# Altium PCB modulo_micro_starter_pcb.PcbDoc
Units mm, origin at the board's own origin, x right, y up, seen from the top; angles counter-clockwise.
Board outline 14.99 x 15.62 mm, 2 copper layers (Top Layer, Bottom Layer); 14 components, 11 nets, 41 pads, 9 vias.
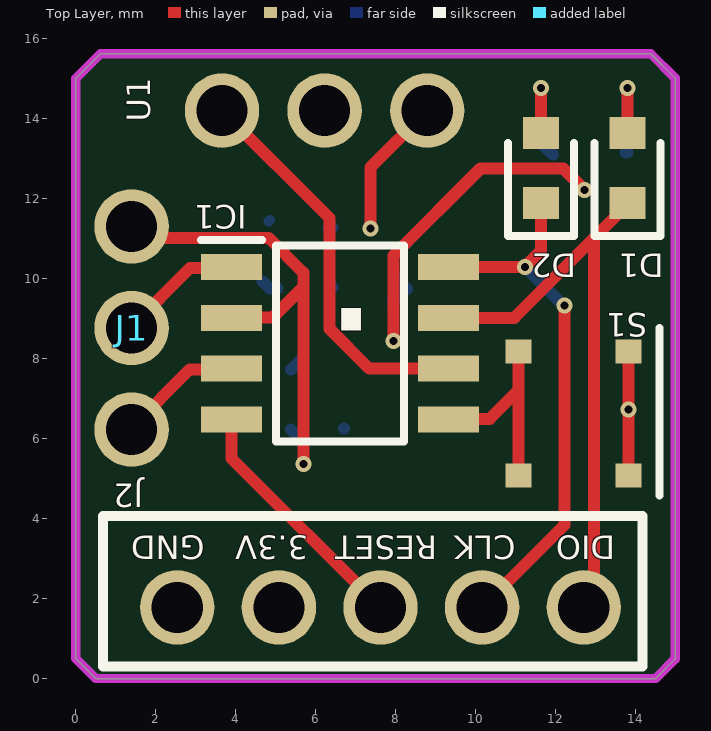
[diagram p0: Top Layer view]
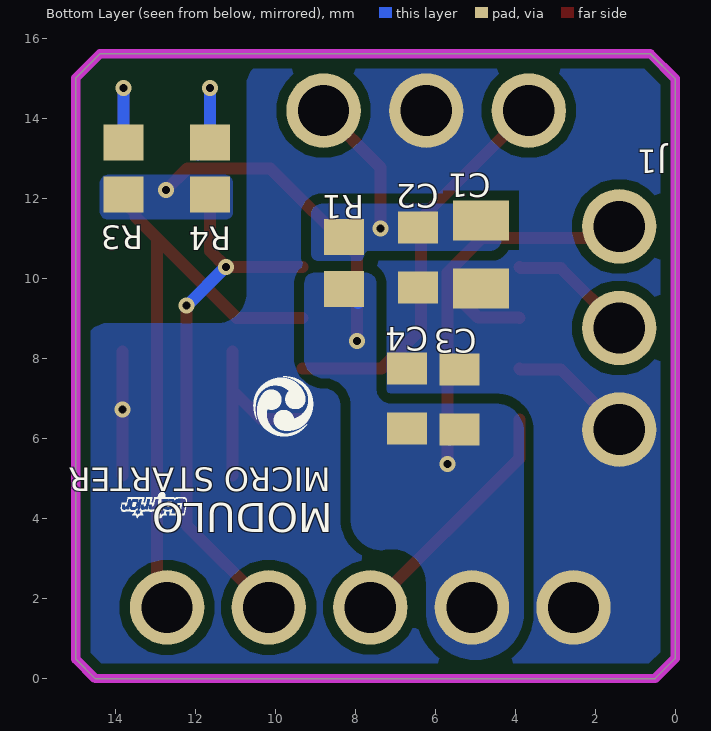
[diagram p1: Bottom Layer view, seen from below]

## Layer stack, top to bottom
Top Solder: solder mask 0.0102, Solder Resist, Dk 3.5
Top Layer: signal copper 0.0356
Dielectric 1: dielectric 0.32, FR-4, Dk 4.8
Bottom Layer: signal copper 0.0356
Bottom Solder: solder mask 0.0102, Solder Resist, Dk 3.5

## Board outline
0,15 0,0.5 0.5,0 14.5,0 14.986,0.486 14.986,15.014 14.379,15.621 0.621,15.621

## Design rules (kind name [scope] priority, off if disabled: settings)
Clearance [All] p1: gap=0.254 ignorepadtopadclearanceinfootprint=FALSE except(0: Arc-Hole Track-Hole SMDPad-Hole THPad-Hole Via-Hole Fill-Hole Poly-Hole Region-Hole Text-Hole)
PlaneConnect [All] p1: planeconnectstyle=Direct reliefexpansion=0.508 reliefentries=4 reliefconductorwidth=0.254 reliefairgap=0.254
PolygonConnect [All] p1: connectstyle=Direct reliefconductorwidth=0.254 reliefentries=4 polygonreliefangle="90 Angle" airgapwidth=0.254
RoutingVias [All] p1: holewidth=0.711 width=1.27 viastyle="Through Hole" minholewidth=0.711 minwidth=1.27 maxholewidth=0.711 maxwidth=1.27
SolderMaskExpansion [All] p1: expansion=0.102 istentingtop=FALSE
Width [All] p1: maxlimit=0.3 minlimit=0.254 preferedwidth=0.3 minimp=50.000000 maximp=50.000000 favimp=50.000000
29 further rules are at their usual default settings.

## Components (designator, comment, footprint, x,y, rotation, side; value= is the part's Value field where it differs from the comment)
C1 "100 uF" C0805 14.65,28.74 r90 bottom
C2 "0.1 uF" C0603 -66.962,197.74 r90 bottom
C3 "0.1 uF" C0603 78.773,-180.239 r270 bottom
C4 "4.7uF" C0603 80.094,-180.214 r270 bottom
D1 "Green" LED_0603 13.792,12.637 r90 top
D2 "Green" LED_0603 11.633,12.637 r90 top
IC1 "STM32G030J6M6" SO8N 6.604,8.382 r0 top
J1 "Male Header 3" "MALE HEADER 3" 1.397,11.303 r270 top
J2 "STM Bootloader" "STM BOOTLOADER" 12.7,1.778 r180 top
R1 "100 R" RESISTOR_0603 8.28,10.389 r270 bottom
R3 "100 R" RESISTOR_0603 13.792,12.751 r90 bottom
R4 "100 R" RESISTOR_0603 11.633,12.751 r90 bottom
S1 "PTS540JK035SMTRLFS" PUSH_BUTTON 11.068,8.18 r270 top
U1 "VS1838B" "FEMALE HEADER 3" 8.788,14.199 r180 top

## Footprints (in the part's own frame and the unit in brackets; to place one, negate y for a bottom-side part, rotate by r counter-clockwise, add the part's x,y. Pads: shape width x height; smd on the part's side, far side on the other; paste and mask are expansions set on the pad)
C0603 [mm]
  rect 0.8x1 smd: 1(-187.961,73.388) 2(-186.461,73.388)
  body extent -188.06,72.92 -186.36,73.82, height 0.8
C0805 [mm]
  rect 1x1.4 smd: 1(-18.985,-9.799) 2(-17.285,-9.799)
  body extent -19.21,-10.47 -17.06,-9.12, height 0.9
"FEMALE HEADER 3" [mm]
  round 1.86 hole 1.28: PIN1(0,0) PIN2(2.565,0) PIN3(5.13,0)
  body extent -1.52,-1.27 6.6,1.27, height 8.5
LED_0603 [mm]
  rect 0.8x0.9 smd: A(1.003,0) C(-0.75,0)
  silkscreen extent -1.58,-0.82 0.75,0.82, body extent -0.67,-0.4 0.93,0.4, height 0.7
"MALE HEADER 3" [mm]
  round 1.86 hole 1.28: PIN1(0,0) PIN2(2.54,0) PIN3(5.08,0)
  body extent -1.27,-1.27 6.35,1.27, height 3.5
PUSH_BUTTON [mm]
  rect 0.6x0.65 smd: 1(0,2.75) 1(3.1,2.75) 2(0,0) 2(3.1,0)
  silkscreen extent -0.58,3.53 3.61,3.53, body extent -0.29,-0.45 3.41,3.25, height 0.3
RESISTOR_0603 [mm]
  rect 0.9x1 smd: 1(-0.65,0) 2(0.65,0)
  body extent -0.8,-0.4 0.8,0.4, height 0.55
SO8N [mm]
  rect 1.525x0.65 smd: 1(-2.712,1.905) 2(-2.712,0.635) 3(-2.712,-0.635) 4(-2.712,-1.905) 5(2.712,-1.905) 6(2.712,-0.635) 7(2.712,0.635) 8(2.712,1.905)
  silkscreen extent -3.47,-2.45 1.6,2.58, body extent -3,-2.45 3,2.45, height 1.75
"STM BOOTLOADER" [mm]
  round 1.86 hole 1.28: CLK(2.54,0) DIO(0,0) GND(10.16,0) RESET(5.08,0) VCC(7.62,0)
  silkscreen extent -1.47,-2.29 12.01,1.47, body extent -1.32,-1.19 11.88,1.35, height 8.5

## Part data
C1: library part JMK212BBJ107MG-TE, "CAP CER 100UF 6.3V X5R 0805", Manufacturer="TAIYO YUDEN", Operating Temperature="-55 C ~ 85 C", Package / Case="0805 (2012 Metric)", Part Number=JMK212BBJ107MGTE, Supplier Part Number 1=963-JMK212BBJ107MGTE, Tolerance=20%, Voltage - Rated=6.3V, Category="Ceramic Capacitor", ComponentLink1Description=Datasheet, ComponentLink1URL=https://ds.yuden.co.jp/TYCOMPAS/ut/detail?pn=JMK212BBJ107MG-TE&u=M, ComponentLink2Description="Mouser Link", ComponentLink2URL=https://br.mouser.com/ProductDetail/Taiyo-Yuden/JMK212BBJ107MG-TE?qs=%2Fha2pyFadujnrq1V71i9DT3lBuRfsdZxICgBGkmgMyDSXYhp4%252BfygEm2aQR9aTWJ, Dieletric=X5R, ESR=-, Library Control - Checked Footprint=Yes, Library Control - Checked Schematic=Yes, Library Control - Last Update="28/06/2021 00:45", Library Control - Person that Checked Footprint=Nikaum, Library Control - Person that Checked Schematic=Nikaum, Library Control - Person that did the Last Update Footprint=Nikaum, Library Control - Person that did the Last Update Schematic=Nikaum, Library Ref=Capacitor, Price="1= 1,81, 10= 1,32, 100= 1,05 (USD)", Size / Dimension="2,00 L x 1,25 W x 1,45 H", Supplier 1=MOUSER
C2 C3: library part GRM188R71E104KA01D, "CAP CER 0.1uF 25V X7R 0603", Manufacturer="Murata Electronics", Operating Temperature="-55 C ~ 125 C", Package / Case="0603 (1608 Metric)", Supplier Part Number 1=81-GRM39X104K25, Tolerance=10%, Voltage - Rated="25 VDC", Category="Ceramic Capacitors", ComponentLink1Description=Datasheet, ComponentLink1URL=https://br.mouser.com/datasheet/2/281/murata_03052018_GRM_Series_1-1310166.pdf, ComponentLink2Description="Mouser Link", ComponentLink2URL=https://br.mouser.com/ProductDetail/Murata-Electronics/GRM188R71E104KA01D?qs=%2Fha2pyFaduiZGTXBCPzk%2FmTbMtAE8bS6%252BO3gVgb8hKBi1xePxGtiOg%3D%3D, Dieletric=X7R, ESR="100 mΩ", Library Control - Checked Footprint=Yes, Library Control - Checked Schematic=Yes, Library Control - Last Update="28/06/2021 00:22", Library Control - Person that Checked Footprint=Nikaum, Library Control - Person that Checked Schematic=Nikaum, Library Control - Person that did the Last Update Footprint=Raquel, Library Control - Person that did the Last Update Schematic=Nikaum, Library Ref=Capacitor, Part Number=GRM188R71E104KA01D, Price=-, Size / Dimension="1,60 L x 0,80 W x 0,80 H", Supplier 1=Mouser
C4: library part CC0603KRX5R8BB475, "CAP CER 4.7uF 25V X5R 0603", Manufacturer=Yageo, Operating Temperature="-55 C ~ 125 C", Package / Case="0603 (1608 Metric)", Supplier Part Number 1=603-CC0603KRX58BB475, Tolerance=10%, Voltage - Rated=25V, Category="Ceramic Capacitor", ComponentLink1Description=Datasheet, ComponentLink1URL=https://br.mouser.com/datasheet/2/447/yago_s_a0011397150_1-2286655.pdf, ComponentLink2Description="Mouser Link", ComponentLink2URL=https://br.mouser.com/ProductDetail/Yageo/CC0603KRX5R8BB475?qs=%2Fha2pyFaduh%2F7Q8z%252B7Ot0eflSx5gYDgPHryPFxzpgCUeMwc25ZtPlNgXae48%252BTjy, Dieletric=X5R, ESR=0.05, Library Control - Checked Footprint=Yes, Library Control - Checked Schematic=Yes, Library Control - Last Update="27/06/2021 23:47", Library Control - Person that Checked Footprint=Nikaum, Library Control - Person that Checked Schematic=Nikaum, Library Control - Person that did the Last Update Footprint=Nikaum, Library Control - Person that did the Last Update Schematic=Nikaum, Library Ref=Capacitor, Part Number=CC0603KRX5R8BB475, Price="1=0.25, 10=0.164, 100=0,093 (USD)", Size / Dimension="1,60 L x 0,80 W x 0,87 H", Supplier 1=Mouser
D1 D2: library part 150060VS75000, "LED 0.072W GREEN 40MCD 0603", Current - Forward (If)="20 mA", Manufacturer="Wurth Elektronik", Max Current Rating=100mA, Max Power Dissipation=72mW, Operating Temperature="-40~85 °C", Package / Case=0603, Reverse Voltage=5V, Supplier Part Number 1=710-150060VS75000, Voltage - Forward (Vf)="2 V", Category="Standard LEDs - SMD", Color=Green, ComponentLink1Description="Mouser Link", ComponentLink1URL=https://br.mouser.com/ProductDetail/Wurth-Elektronik/150060VS75000?qs=%2Fha2pyFaduhuT%2FKGSijZP0vTyJZ9U993KfsBQSxqATYhY9jnc2c09tXoMoJ3wn4L, ComponentLink2Description="Datasheet Link", ComponentLink2URL=https://br.mouser.com/datasheet/2/445/150060VS75000-1714627.pdf, Library Control - Checked Footprint=25/07/2021, Library Control - Checked Schematic=25/07/2021, Library Control - Last Project that Used=Diodo/Led, Library Control - Last Update=06/08/2021, Library Control - Person that Checked Footprint=Nícolas, Library Control - Person that Checked Schematic=Nícolas, Library Control - Person that did the Last Update Footprint=Marcos, Library Control - Person that did the Last Update Schematic=Marcos, Library Ref=LED, Luminous Intensity="40 mcd", Manufacturer Part Number=150060VS75000, Price="1 = 0.15, 50 = 0.138, 100 = 0.118 (USD)", Supplier 1=Mouser, Viewing Angle=140°, Wavelength=570nm
IC1: "IC MCU 32-BIT 8kB FLASH ARM Cortex M0+ 64MHZ  SO8N", Manufacturer=STM, Operating Temperature="-40°C to 85°C", Package/Case=SO8N, Supplier Part Number 1=511-STM32G030J6M6, Voltage - Supply (Vcc/Vdd)="2 V to 3.6 V", Category="ARM Microcontrollers - MCU", ComponentLink1Description="Mouser Link", ComponentLink1URL=https://www.mouser.com/ProductDetail/STMicroelectronics/STM32G030J6M6?qs=uwxL4vQweFMe%2Fiu4dY6izA%3D%3D, ComponentLink2Description="Datasheet Link", ComponentLink2URL=https://www.mouser.com/datasheet/2/389/dm00613878-1799578.pdf, Connectivity=-, Core Processor="ARM Cortex M0+", Library Control - Person that did the Last Update Footprint=Marcos, Library Control - Person that did the Last Update Schematic=Marcos, Library Ref=Microcrontrollers, Number of ADC Channels=4, Number of Ethernet Channels=-, Number of I2C Channels=1, Number of I/Os=5, Number of SPI Channels=3, Number of Timers/Counters=2, Number of UART/USART Channels=1, Oscillator Type=Internal, Part Number=STM32G030J6M6, Peripherals="ADC, Timer, DMA", Price="1 = 1,46, 10 = 1,31,  100 = 1,02, 1000 = 0,665 (USD)", Program Memory Size=64kB, Program Memory Type=Flash, RAM Size="8k B", Series=STM32G0, Speed=64MHz, Supplier 1=Mouser
J2: library part "Barramento de Gravação STM", "BARRAMENTO DE GRAVAÇÃO", Library Ref=Header, Number of Contacts=5
R1 R3 R4: library part RC0603FR-10100RL, "RES SMD 100 OHM 1% 1/10W 0603", Manufacturer=Yageo, Operating Temperature="- 55 C~155 C", Package / Case="0603 (1608 metric)", Power Rating="100mW (1/10W)", Resistor Type=Fixo, Supplier Part Number 1=603-RC0603FR-10100RL, Temperature Coefficient="100 PPM / C", Tolerance="1 %", Voltage Rating="75 V", Category="Thick Film Resistors - SMD", ComponentLink1Description="Mouser Link", ComponentLink1URL=https://br.mouser.com/ProductDetail/Yageo/RC0603FR-10100RL/?qs=EiqXWrxQq62RG9T9SdQg0g==, ComponentLink2Description="Datasheet Link", ComponentLink2URL=https://br.mouser.com/datasheet/2/447/Yageo_03_18_2021_PYu_RC_Group_51_RoHS_L_11-2199992.pdf, Library Control - Checked Footprint=Yes, Library Control - Checked Schematic=Yes, Library Control - Last Update="27/06/2021 21:11", Library Control - Person that Checked Footprint=Nikaum, Library Control - Person that Checked Schematic=Nikaum, Library Control - Person that did the Last Update Footprint=Nicolas, Library Control - Person that did the Last Update Schematic=Nikaum, Library Ref=Resistor, Part Number=RC0603FR-10100RL, Price="1 = 0,10, 10 = 0,018, 100 = 0,006 (USD)", Size / Dimension="1,60 L x 0,80 W x 0,45 H", Supplier 1=Mouser
S1: library part "Push Button", "TACTILE SWITCH SPST 0.05A 12VDC SMD", Current Rating=50mA, Manufacturer="C&K Switches", Operating Force=230gf, Supplier Part Number 1=611-PTS540JK035SMTRL, Voltage Rating (DC)=12V, Bounce time (MAX)=10ms, Category="Tactile Switches", ComponentLink1Description=Datasheet, ComponentLink1URL=https://www.mouser.com/datasheet/2/60/pts540-1841856.pdf, ComponentLink2Description="Mouser Link", ComponentLink2URL=https://www.mouser.com/ProductDetail/CK/PTS540JK035SMTRLFS?qs=nsc5Ve2%252BdoHscnqTjIh87g%3D%3D, Library Control - Checked Footprint=Yes, Library Control - Checked Schematic=Yes, Library Control - Person that Checked Footprint=Nícolas, Library Control - Person that Checked Schematic=Nícolas, Library Control - Person that did the Last Update Schematic=Nícolas, Library Ref=Diversos, Orientation=Straight, Part Number=PTS540JK035SMTRLFS, Pricing 1="1=0,18, 10=0,174, 100=0,15, 500=0,122, 1000=0,103 (USD)", Supplier 1=Mouser, Switch Function=Off-On, Throw Configuration=SPST
U1: "INFRARED RECEIVER MODULE", Manufacturer=-, Operating Supply Current="0.4 mA", Operating Temperature (Min - Máx)="-20~80 °C", Supply Voltage (Min - Máx)="(2.7 - 5.5)V", ComponentLink1Description=Datasheet, ComponentLink1URL=https://datasheetspdf.com/pdf-file/700398/ETC/VS1838B/1, ComponentLink2Description="Mouser Link", ComponentLink2URL=-, Library Control - Last Update=06/08/2021, Library Control - Person that did the Last Update in Footprint=Marcos, Library Control - Person that did the Last Update in Schematic=Marcos, Library Ref=Diversos, Output Type=Digital, Package / Case=-, Part Number=VS1838B, Price=-, Sensitivity="+/- 45°", Sensor Type=Infrared, Supplier 1=-
J1: Library Control - Person that did the Last Update Schematic=Guilherme, Library Control - Persont that did the Last Update Footprint=Guilherme, Library Ref=Header, Number of Contacts=3, System=Connector

## Via types
v1: diameter 0.4, hole 0.2, Top Layer to Bottom Layer, tented both sides, 9 vias

## Nets (pads, with @x,y where several pads share a name; then routed paths per layer and width w, separated by ;. In a path a pad name is that pad's centre, name@x,y a point inside that pad or via, vN(x,y) a via of type N, cw(c..) or ccw(c..) an arc to the next point about the centre after c; other vN are vias at no path point)
"BLUE LED": D2.C IC1.8 J2.CLK | length 13.5
  Top Layer w0.3: IC1.8 v1(11.227,10.287) 11.633,10.693 D2.C ; J2.CLK 12.217,3.835 v1(12.217,9.322)
  Bottom Layer w0.3: v1(11.227,10.287) 11.239,10.287 12.205,9.322 v1(12.217,9.322)
BUTTON: IC1.5 S1.2 | length 5.2
  Top Layer w0.3: IC1.5 9.331,6.492 10.353,6.492 11.068,7.207 ; S1.2@11.068,5.079 11.068,7.207 ; S1.2@11.068,8.179 11.068,7.207
IR: IC1.6 U1.PIN3 | length 10
  Top Layer w0.3: U1.PIN3 6.348,11.508 6.348,8.739 7.341,7.747 IC1.6
NetC1_2: C1.2 C2.2 R1.1 U1.PIN1 | length 3.7
  Top Layer w0.3: v1(7.366,11.252) 7.366,12.777 U1.PIN1
  Bottom Layer w0.254: C1.2@4.827,11.431 C1.2
  Bottom Layer w0.3: C2.2@6.326,11.279 C2.2
NetD1_A: D1.A R3.2 | length 2.5
  Top Layer w0.3: D1.A v1(13.792,14.757)
  Bottom Layer w0.3: R3.2@13.742,13.147 R3.2@13.792,13.147 ; R3.2 v1(13.792,14.757)
NetD2_A: D2.A R4.2 | length 2.9
  Top Layer w0.3: D2.A v1(11.633,14.757)
  Bottom Layer w0.3: v1(11.633,14.757) R4.2 R4.2@11.933,13.101
"RED LED": D1.C IC1.7 J2.DIO | length 15.2
  Top Layer w0.3: IC1.7 10.934,9.017 ; 10.964,9.017 13.492,11.545 13.492,11.637 13.742,11.887 D1.C ; J2.DIO 12.954,2.032 12.954,10.964
  Bottom Layer w0.3: J2.DIO@12.446,1.778 J2.DIO
RESET: IC1.4 J2.RESET | length 6.2
  Top Layer w0.3: IC1.4 3.892,5.506 J2.RESET
SIGNAL: IC1.1 J1.PIN2 | length 3.1
  Top Layer w0.3: J1.PIN2 1.397,8.801 2.855,10.259 3.864,10.259 IC1.1
VDD: C3.2 C4.2 IC1.2 J1.PIN1 J2.VCC R1.2 R3.1 R4.1 | length 21
  Top Layer w0.3: J1.PIN1 1.684,11.016 4.822,11.016 5.69,10.148 5.69,9.788 ; IC1.2 3.902,9.027 4.929,9.027 5.69,9.788 ; v1(5.69,5.359) 5.69,9.788 ; v1(7.95,8.433) 7.95,10.58 10.121,12.751 12.192,12.751 v1(12.725,12.217)
  Bottom Layer w0.3: C3.2@5.389,6.222 C3.2@5.639,5.972 ; R1.2@7.93,9.389 7.93,9.439 8.23,9.739 R1.2 R1.2@7.98,10.039
VSS: C1.1 C2.1 C3.1 C4.1 IC1.3 J1.PIN3 J2.GND S1.1 U1.PIN2 | length 7
  Top Layer w0.3: J1.PIN3@1.397,6.274 2.855,7.732 3.877,7.732 IC1.3 ; S1.1@13.818,5.079 v1(13.818,6.731) S1.1@13.818,8.179
  Bottom Layer w0.3: C1.1@4.675,9.931 C1.1 C1.1@5.051,9.755 ; C3.1 C3.1@5.587,7.924 ; C2.1@6.363,9.716 C2.1

## Polygon pours and split planes (outlines as drawn)
NetC1_2 on Bottom Layer "NONET_L02_P-001" (solid, remove dead copper, pour order 0): 4.353,11.614 4.353,10.953 ccw(c4.607,10.953) 4.607,10.699 7.639,10.699 cw(c7.639,10.566) 7.772,10.566 ccw(c7.899,10.566) 7.899,10.439 8.915,10.439 ccw(c8.915,10.627) 9.103,10.627 9.103,11.588 ccw(c8.823,11.588) 8.823,11.868 4.607,11.868 ccw(c4.607,11.614)
VDD on Bottom Layer "NONET_L02_P-001" (solid, pour order 3): 8.996,10.147 cw(c8.996,9.868) 9.276,9.868 9.276,8.031 cw(c8.751,8.031) 8.75,7.506 ccw(c8.75,6.868) 8.112,6.868 8.112,4.01 cw(c7.329,3.989) 7.309,3.206 ccw(c7.085,2.373) 6.458,2.966 ccw(c7.069,2.388) 6.228,2.388 6.228,1.689 cw(c5.009,1.689) 5.009,0.47 4.958,0.47 cw(c4.958,1.638) 3.789,1.638 3.789,6.185 cw(c4.475,6.185) 4.475,6.871 7.117,6.871 ccw(c7.117,7.226) 7.472,7.226 7.472,9.868 cw(c7.752,9.868) 7.752,10.147
VSS on Bottom Layer "NONET_L02_P-001" (solid, remove dead copper, pour order 4): 1.768,15.433 1.234,15.433 ccw(c1.234,14.341) 0.142,14.341 0.142,1.285 ccw(c1.285,1.285) 1.285,0.142 13.807,0.142 ccw(c13.807,1.133) 14.798,1.133 14.798,8.245 ccw(c14.163,8.245) 14.163,8.88 11.471,8.88 cw(c11.471,9.642) 10.709,9.642 10.709,14.823 ccw(c10.074,14.823) 10.074,15.458
VDD on Bottom Layer "NONET_L02_P-001" (solid, pour order 5): 14.381,12.37 ccw(c14.153,12.37) 14.153,12.598 11.282,12.598 ccw(c11.282,12.37) 11.054,12.37 11.054,11.659 ccw(c11.232,11.659) 11.232,11.481 14.178,11.481 ccw(c14.178,11.684) 14.381,11.684

## Keep-outs
Keep-Out Layer:
  the board outline again, w0.234

## Silkscreen, mask and mechanical layers (free items; w line width, h text height)
Top Overlay:
  text "." at 7.645,10.389 h6 r180
Bottom Overlay:
  drawing of 9 lines, arcs and shapes, not listed
  text "MICRO STARTER" at 8.61,5.471 h1 r180
  text "MODULO" at 8.559,4.627 h1.25 r180
BoardOutLine:
  the board outline again, w0.254

## Text inside footprints (layer, text, board x,y; h text height)
J2: Top Overlay "DIO" at 13.487,3.775 h1 r180; Top Overlay "GND" at 3.226,3.77 h1 r180; Top Overlay "3.3V" at 5.817,3.77 h1 r180; Top Overlay "RESET" at 9.042,3.775 h1 r180; Top Overlay "CLK" at 10.998,3.775 h1 r180